# EAGLE board baseboard (EAGLE 9.6.2)
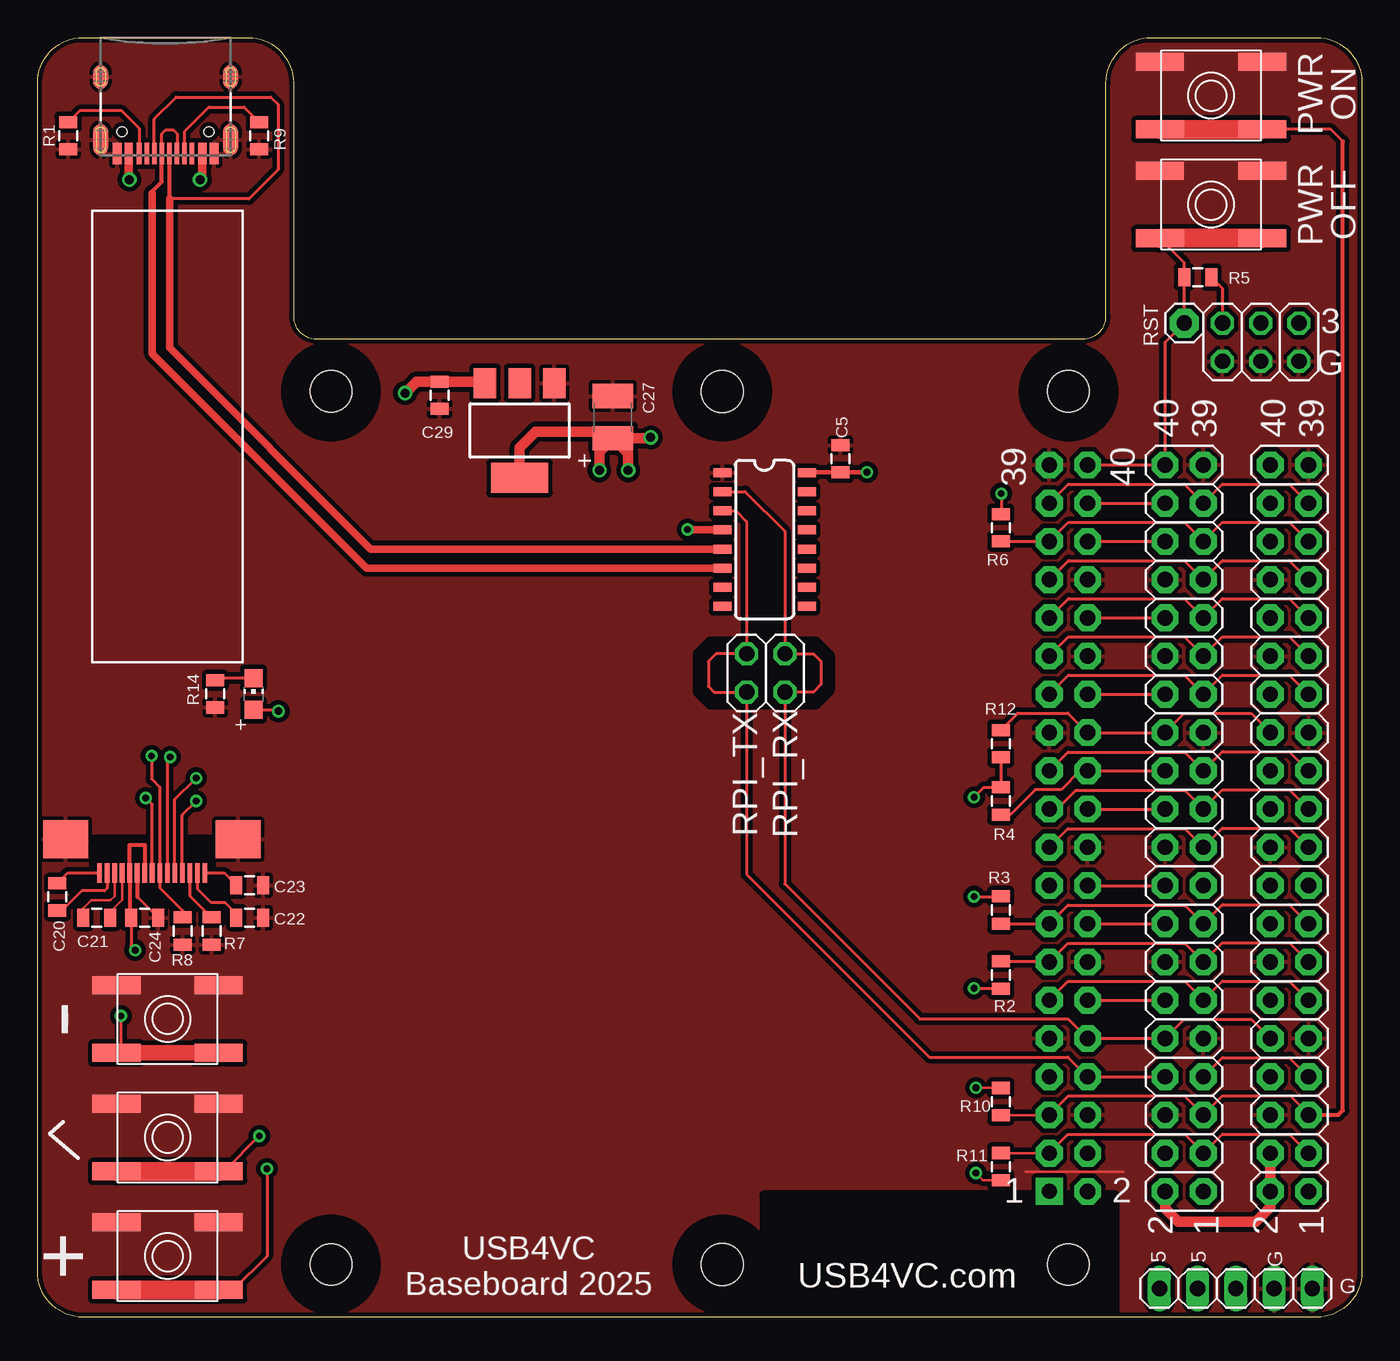
[diagram p0: board, top side]
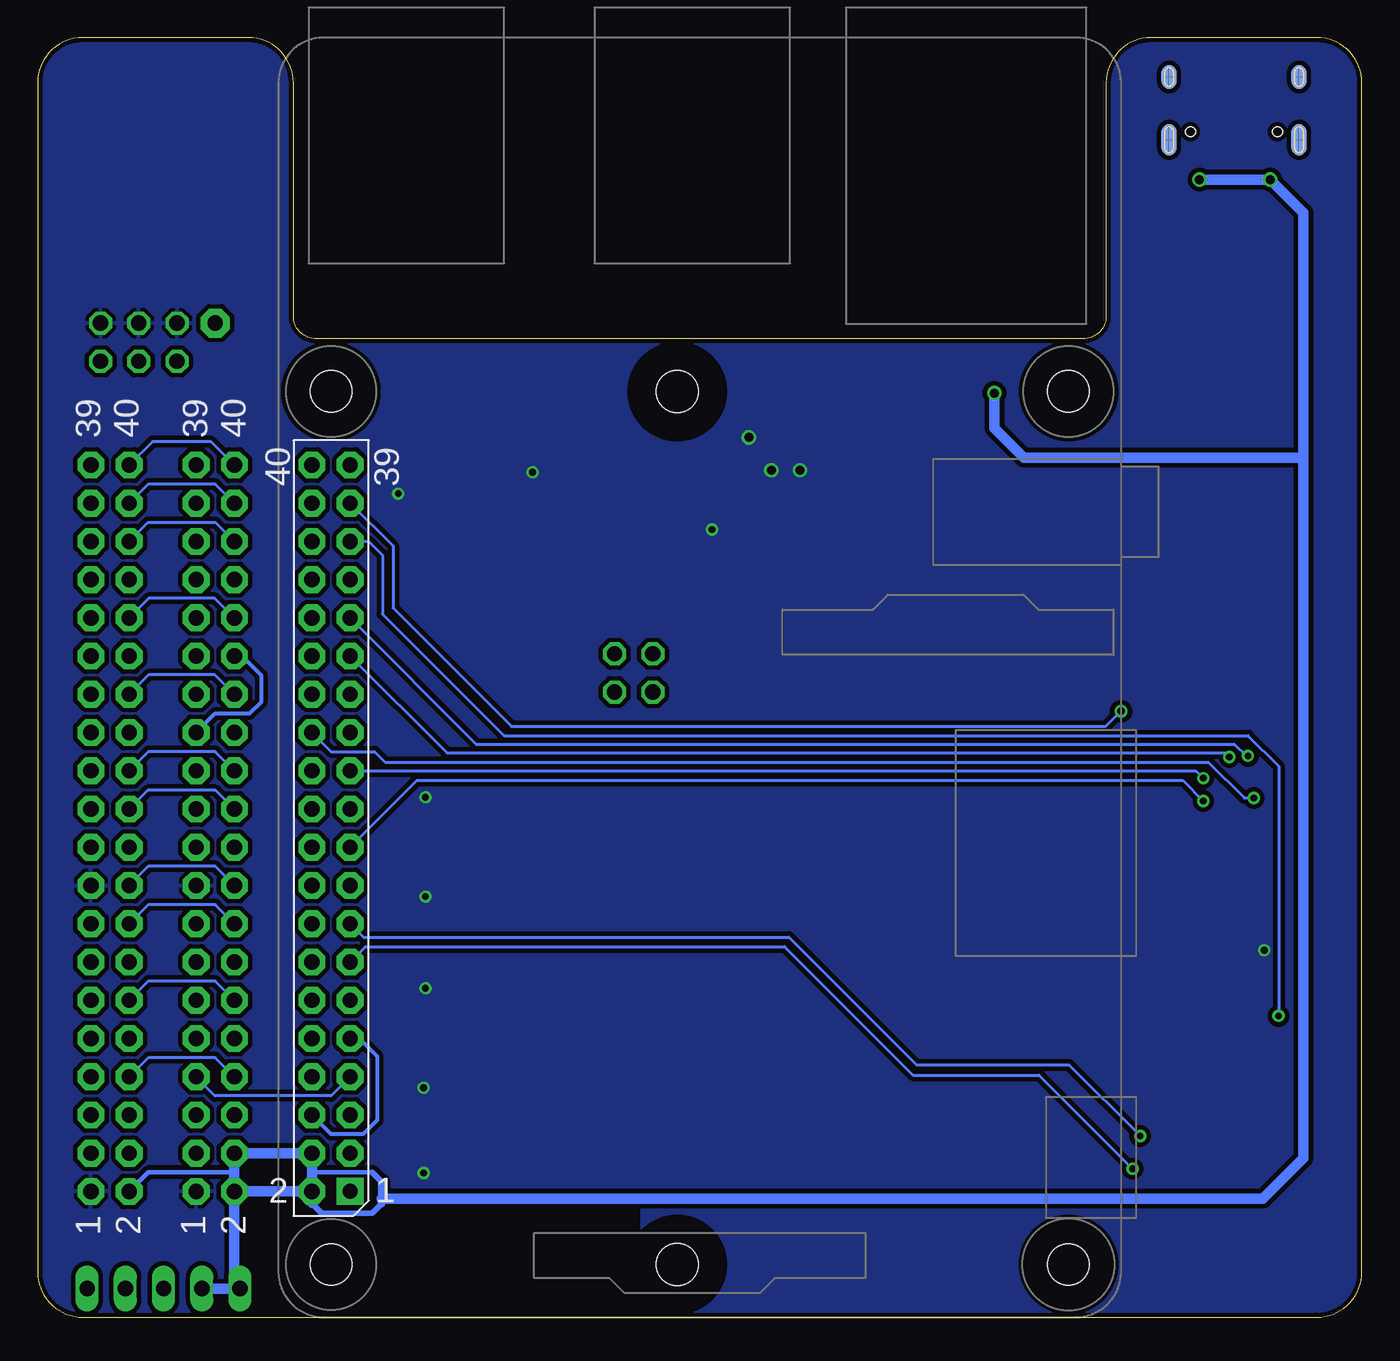
[diagram p1: board, bottom side, seen from below]

Size 88 x 85 mm. Coordinates in mm from the lower left corner, seen from the top.
Outline: 74,85 85,85 arc-90 88,82 88,3 arc-90 85,0 3,0 arc-90 0,3 0,82 arc-90 3,85 14,85 arc-90 17,82 17,66.5 arc90 18.5,65 69.5,65 arc90 71,66.5 71,82 arc-90 74,85
Copper layers (1*16): Top 0.035mm / dielectric 1.5mm / Bottom 0.035mm
Design rules "deku_2layer_6mil": minimum track width 6mil, minimum drill 15mil, track to track 6mil, track to pad 6mil, pad to pad 6mil, via to via 6mil, smd to smd 6mil, copper to edge 10mil, drill to drill 6mil, minimum pad ring 7mil, minimum via ring 7mil, stop-mask expansion 4mil, vias tented up to drill 25mil, thermal gap 10mil
Net classes: 1 power: width 0.178 mm
tRestrict: area 3.7,27.4 to 11.6,31.8; area 65.5,0.5 to 71.5,6.5; area 16.5,0.5 to 22.5,6.5; area 65.5,58.5 to 71.5,64.5; area 16.5,58.5 to 22.5,64.5; area 48.3,0 to 71.6,8.1; area 43.9,40.8 to 52.6,44.8
bRestrict: area 65.5,58.5 to 71.5,64.5; area 65.5,0.5 to 71.5,6.5; area 16.5,0.5 to 22.5,6.5; area 16.5,58.5 to 22.5,64.5; area 48.3,0 to 71.6,8.1

## Footprints (pad centres in the part's own frame; a part is rotated, then mirrored left to right if it is on the bottom)
0805 = smd 0.8 x 1.2: 1 -0.9,0; 2 0.9,0
C1210 = smd 1.6 x 2.7: 1 -1.4,0; 2 1.4,0
SOT223 = smd 1.5 x 2: 1 -2.3,-3.15; 2 0,-3.15; 3 2.3,-3.15 | smd 3.8 x 2: 4 0,3.15
USB-C-16P = smd 0.3 x 1.45: A5 -1.25,0; A6 -0.25,0; A7 0.25,0; A8 1.25,0; B5 1.75,0; B6 0.75,0; B7 -0.75,0; B8 -1.75,0 | smd 0.6 x 1.45: GND -3.225,0; GND2 3.225,0 | smd 1 x 2.1: SHLD1 -4.32,-0.915; SHLD2 4.32,-0.915 | smd 1 x 2.1 bottom: SHLD3 -4.32,-0.915; SHLD4 4.32,-0.915 | smd 1 x 1.6: SHLD5 -4.32,-5.095; SHLD8 4.32,-5.095 | smd 1 x 1.6 bottom: SHLD6 -4.32,-5.095; SHLD7 4.32,-5.095 | smd 0.55 x 1.45: VBUS1 -2.45,0; VBUS2 2.45,0 | hole 0.65: -2.89,-1.445; 2.89,-1.445
1X01 = drill 1.016 pad 1.93 octagon: 1 0,0
1X05 = drill 1.016 long: 1 -5.08,0; 2 -2.54,0; 3 0,0; 4 2.54,0; 5 5.08,0
2X03 = drill 1.016 octagon: 1 -2.54,-1.27; 2 -2.54,1.27; 3 0,-1.27; 4 0,1.27; 5 2.54,-1.27; 6 2.54,1.27
2X02 = drill 1.016 octagon: 1 -1.27,-1.27; 2 -1.27,1.27; 3 1.27,-1.27; 4 1.27,1.27
CHIP-LED0805 = smd 1.2 x 1.2: A 0,-1.05; C 0,1.05
RPI3-NO-CONNECTORS = drill 1.016 pad 1.778 square: P$1 -8.37,51.23 | drill 1.016 pad 1.778 octagon: P$2 -8.357,53.772; P$3 -10.897,51.232; P$4 -10.897,53.772; P$5 -13.437,51.232; P$6 -13.437,53.772; P$7 -15.977,51.232; P$8 -15.977,53.772; P$9 -18.517,51.232; P$10 -18.517,53.772; P$11 -21.057,51.232; P$12 -21.057,53.772; P$13 -23.597,51.232; P$14 -23.597,53.772; P$15 -26.137,51.232; P$16 -26.137,53.772; P$17 -28.677,51.232; P$18 -28.677,53.772; P$19 -31.217,51.232; P$20 -31.217,53.772; P$21 -33.757,51.232; P$22 -33.757,53.772; P$23 -36.297,51.232; P$24 -36.297,53.772; P$25 -38.837,51.232; P$26 -38.837,53.772; P$27 -41.377,51.232; P$28 -41.377,53.772; P$29 -43.917,51.232; P$30 -43.917,53.772; P$31 -46.457,51.232; P$32 -46.457,53.772; P$33 -48.997,51.232; P$34 -48.997,53.772; P$35 -51.537,51.232; P$36 -51.537,53.772; P$37 -54.077,51.232; P$38 -54.077,53.772; P$39 -56.617,51.232; P$40 -56.617,53.772 | hole 2.75: -3.5,3.5; -61.5,3.5; -3.5,52.5; -61.5,52.5
2X20-BIG = drill 1.016 pad 1.778 octagon: 1 -24.13,-1.27; 2 -24.13,1.27; 3 -21.59,-1.27; 4 -21.59,1.27; 5 -19.05,-1.27; 6 -19.05,1.27; 7 -16.51,-1.27; 8 -16.51,1.27; 9 -13.97,-1.27; 10 -13.97,1.27; 11 -11.43,-1.27; 12 -11.43,1.27; 13 -8.89,-1.27; 14 -8.89,1.27; 15 -6.35,-1.27; 16 -6.35,1.27; 17 -3.81,-1.27; 18 -3.81,1.27; 19 -1.27,-1.27; 20 -1.27,1.27; 21 1.27,-1.27; 22 1.27,1.27; 23 3.81,-1.27; 24 3.81,1.27; 25 6.35,-1.27; 26 6.35,1.27; 27 8.89,-1.27; 28 8.89,1.27; 29 11.43,-1.27; 30 11.43,1.27; 31 13.97,-1.27; 32 13.97,1.27; 33 16.51,-1.27; 34 16.51,1.27; 35 19.05,-1.27; 36 19.05,1.27; 37 21.59,-1.27; 38 21.59,1.27; 39 24.13,-1.27; 40 24.13,1.27
EVQ-Q2 = smd 3.2 x 1.2: A -3.4,-2.25; A' 3.4,-2.25; B -3.4,2.25; B' 3.4,2.25
LUL_UG-2864HSWEG01_1.3_WRAPAROUND = smd 0.31 x 1.28: 1 3.5,0; 2 3,0; 3 2.5,0; 4 2,0; 5 1.5,0; 6 1,0; 7 0.5,0; 8 0,0; 9 -0.5,0; 10 -1,0; 11 -1.5,0; 12 -2,0; 13 -2.5,0; 14 -3,0; 15 -3.5,0 | smd 3 x 2.5: 16 5.75,-2.24; 17 -5.7,-2.24
SO016 = smd 0.6 x 1.2: 1 -4.445,-2.8; 2 -3.175,-2.8; 3 -1.905,-2.8; 4 -0.635,-2.8; 5 0.635,-2.8; 6 1.905,-2.8; 7 3.175,-2.8; 8 4.445,-2.8; 9 4.445,2.8; 10 3.175,2.8; 11 1.905,2.8; 12 0.635,2.8; 13 -0.635,2.8; 14 -1.905,2.8; 15 -3.175,2.8; 16 -4.445,2.8
M2.5HOLE = hole 2.8: 0,0

## Placement (x,y rotation side)
C5  100nF  [0805]  53.34,57.02 270 top
C20  1uF  [0805]  1.31,27.92 90 top
C21  1uF  [0805]  3.94,26.54 180 top
C22  2.2uF  [0805]  14.1,26.54 180 top
C23  2.2uF  [0805]  14.1,28.7 180 top
C24  100nF  [0805]  7.11,26.54 180 top
C27  47uF  [C1210]  38.23,59.79 90 top
C29  2.2uF  [0805]  26.71,61.25 90 top
IC1  LD117AS33TR  [SOT223]  32.03,58.9 180 top
J2  [USB-C-16P]  8.5,77.3 180 top
JP3  [1X01]  76.2,66.04 0 top
JP5  [1X05]  79.63,1.91 0 top
JP6  [2X03]  81.28,64.77 0 top
JP7  [2X02]  48.39,42.8 180 top
LED1  [CHIP-LED0805]  14.35,41.4 0 top
P1  RPI3NO-CONNECTORS  [RPI3-NO-CONNECTORS]  16,0 270 top
P2  [2X20-BIG]  76.2,32.49 90 top
P3  [2X20-BIG]  83.19,32.49 90 top
R1  5.1K  [0805]  2.03,78.49 270 top
R2  5.1K  [0805]  64.01,22.73 270 top
R3  5.1K  [0805]  64.01,27.05 90 top
R4  5.1K  [0805]  64.01,34.29 270 top
R5  5.1K  [0805]  77.09,69.09 0 top
R6  5.1K  [0805]  64.01,52.45 90 top
R7  390K  [0805]  11.56,25.65 90 top
R8  5.1K  [0805]  9.65,25.65 270 top
R9  5.1K  [0805]  14.73,78.49 270 top
R10  5.1K  [0805]  64.01,14.33 270 top
R11  5.1K  [0805]  64.01,10.01 90 top
R12  5.1K  [0805]  64.01,38.1 90 top
R14  2K  [0805]  11.81,41.4 90 top
SW2  SPST_TACT-EVQQ2  [EVQ-Q2]  77.98,73.91 180 top
SW5  SPST_TACT-EVQQ2  [EVQ-Q2]  8.64,19.81 0 top
SW6  SPST_TACT-EVQQ2  [EVQ-Q2]  8.64,11.94 0 top
SW7  SPST_TACT-EVQQ2  [EVQ-Q2]  8.64,4.06 0 top
SW8  SPST_TACT-EVQQ2  [EVQ-Q2]  77.98,81.15 0 top
U2  [LUL_UG-2864HSWEG01_1.3_WRAPAROUND]  7.62,29.51 180 top
U5  CH340C  [SO016]  48.31,51.66 270 top
U$2  M2.5HOLE  [M2.5HOLE]  45.5,3.5 0 top
U$3  M2.5HOLE  [M2.5HOLE]  45.5,61.5 0 top

## Library data of the parts
C5 C20-C24 C27 C29 = clock
IC1 = v-reg
J2 = SparkFun-Connectors; PROD_ID: CONN-14122
JP3 P2 P3 = adafruit_changed
JP5-JP7 = pinhead
LED1 = adafruit
P1 = e14_Rpi3_RevA
R1 R4 R8-R12 = joyAnalog
R2 R3 R5-R7 R14 = SparkFun-Passives
SW2 SW5-SW8 = duckypad
U2 = lul
U5 = SparkFun-IC-Comms; PROD_ID: IC-14038
U$2 U$3 = f1c100s

## Nets
+3V3: C5.2 C24.2 C27.1 IC1.4 JP6.2 JP6.4 JP6.6 P2.1 P2.17 P3.1 P3.17 R2.2 R3.2 R4.1 R5.2 R6.2 R10.1 R11.1 R12.1 U2.5 U2.7 U5.4 U5.16
+5V: C29.2 IC1.3 J2.VBUS1 J2.VBUS2 JP5.1 JP5.2 P1.P$2 P1.P$4 P2.2 P2.4 P3.2 P3.4
ENTER_BUTTON: P1.P$15 P2.15 P3.15 R3.1 SW6.A SW6.A'
GND: C5.1 C22.1 C23.1 C24.1 C27.2 C29.1 IC1.1 J2.GND J2.GND2 J2.SHLD1 J2.SHLD2 J2.SHLD3 J2.SHLD4 J2.SHLD5 J2.SHLD6 J2.SHLD7 J2.SHLD8 JP5.4 JP5.5 JP6.1 JP6.3 JP6.5 P1.P$6 P1.P$9 P1.P$14 P1.P$20 P1.P$25 P1.P$30 P1.P$34 P1.P$39 P2.6 P2.9 P2.14 P2.20 P2.25 P2.30 P2.34 P2.39 P3.6 P3.9 P3.14 P3.20 P3.25 P3.30 P3.34 P3.39 R1.2 R7.1 R8.2 R9.2 R14.1 SW2.A SW2.A' SW5.B SW5.B' SW6.B SW6.B' SW7.B SW7.B' SW8.B SW8.B' U2.6 U2.16 U2.17 U5.1
MINUS_BUTTON: P1.P$35 P2.35 P3.35 R6.1 SW5.A SW5.A'
N$1: J2.A6 J2.B6 U5.5
N$2: J2.A5 R9.1
N$3: J2.A7 J2.B7 U5.6
N$4: LED1.A P1.P$37 P2.37 P3.37
N$5: P1.P$3 P2.3 P3.3 R11.2
N$6: P1.P$5 P2.5 P3.5 R10.2 SW8.A SW8.A'
N$7: J2.B5 R1.1
N$8: P1.P$7 P2.7 P3.7
N$9: P1.P$11 P2.11 P3.11
N$10: LED1.C R14.2
N$12: P1.P$19 P2.19 P3.19 U2.12
N$13: P1.P$21 P2.21 P3.21
N$14: P1.P$23 P2.23 P3.23 U2.11
N$15: P1.P$27 P2.27 P3.27
N$16: P1.P$29 P2.29 P3.29 U2.10
N$19: P1.P$33 P2.33 P3.33
N$22: P1.P$12 P2.12 P3.12
N$23: P1.P$16 P2.16 P3.16
N$24: P1.P$18 P2.18 P3.18
N$25: P1.P$22 P2.22 P3.22
N$26: P1.P$24 P2.24 P3.24 R4.2
N$27: P1.P$26 P2.26 P3.26 R12.2 U2.8
N$28: P1.P$28 P2.28 P3.28
N$29: P1.P$32 P2.32 P3.32
N$30: P1.P$36 P2.36 P3.36
N$31: P1.P$38 P2.38 P3.38
N$32: JP3.1 P1.P$40 P2.40 P3.40 R5.1 SW2.B SW2.B'
N$35: C20.2 U2.1
N$36: C20.1 U2.2
N$37: C21.2 U2.3
N$38: C21.1 U2.4
N$39: R7.2 U2.13
N$40: C22.2 U2.14
N$41: C23.2 U2.15
N$43: P1.P$31 P2.31 P3.31 R8.1 U2.9
PLUS_BUTTON: P1.P$13 P2.13 P3.13 R2.1 SW7.A SW7.A'
RPI_RX: JP7.1 JP7.2 P1.P$10 P2.10 P3.10 U5.2
RPI_TX: JP7.3 JP7.4 P1.P$8 P2.8 P3.8 U5.3

## Tracks (layer width: path | path; a pad name or v marks a point on that pad's centre or on a via)
+3V3  (via drill 0.45, 0.6)
  Top 0.152: C24.2 6.15,26.6 | v62.36,9.58 62.83,9.11 R11.1 | v62.36,15.24 63.99,15.24 R10.1
  Top 0.203: v62.23,21.84 64,21.84 R2.2 | v62.23,27.94 64,27.94 R3.2 | v64.03,54.71 64.03,53.38 R6.2 | R12.1 R4.1 62.88,35.19 v62.23,34.54 | C24.2 6.21,24.65 v6.48,24.38 | R5.2 78.74,68.34 JP6.2
  Top 0.254: 6.15,26.6 6.12,26.64 U2.5 6.12,31.37 7.12,31.37 U2.7
  Top 0.305: v55.12,56.13 55.11,56.12 C5.2 51.12,56.12 U5.16
  Top 0.508: v43.18,52.32 45.48,52.32 U5.4
  Top 0.711: IC1.4 32.03,57.76 33.09,58.82 37.8,58.82 C27.1 | C27.1 37.34,57.5 v37.34,56.26 | C27.1 39.24,57.38 v39.24,56.26 | C27.1 40.69,58.39 v40.74,58.45
  pour Bottom (isolate 0.305, rank 2): 0,0 0,85 88,85 88,0
+5V  (via drill 0.6)
  Top 0.508: 6.05,75.61 v6.1,75.56 | 10.95,75.72 v10.79,75.56
  Top 0.559: J2.VBUS2 6.05,75.61 | J2.VBUS1 10.95,75.72
  Top 0.61: 29.63,62.15 IC1.3
  Top 0.711: P2.2 74.93,7.19 75.79,6.33 80.95,6.33 81.92,7.29 P3.2 P3.4 | v24.42,61.39 25.18,62.15 C29.2 29.63,62.15
  Bottom 0.305: 65.76,9.63 69.77,9.63 | 74.93,9.68 74.98,9.63 80.64,9.63 P3.2
  Bottom 0.381: 65.13,7.54 65.76,6.91 69.14,6.91 69.77,7.54 | 65.76,9.63 65.13,8.99
  Bottom 0.508: 65.13,8.99 65.13,7.87 65.13,7.54
  Bottom 0.61: 69.77,7.54 P1.P$2 | P2.2 74.91,8.36
  Bottom 0.711: v10.79,75.56 v6.1,75.56 3.89,73.36 3.89,57.1 | 74.91,8.36 P1.P$2 69.77,9.63 P1.P$4 P2.4 74.93,9.68 P2.2 74.93,2.29 JP5.1 JP5.2 | 65.13,7.87 6.58,7.87 3.89,10.57 3.89,57.1 | v24.42,61.39 24.42,59.06 22.45,57.1 3.89,57.1
ENTER_BUTTON  (via drill 0.45)
  Top 0.203: P3.15 83.19,27.41 78.74,27.41 P2.15 76.22,27.38 68.48,27.38 P1.P$15 67.22,26.15 R3.1 | v14.73,12.04 12.38,9.69 SW6.A'
  Top 1.27: SW6.A SW6.A'
  Bottom 0.203: P1.P$15 66.34,25.25 38.08,25.25 29.59,16.76 19.46,16.76 v14.73,12.04
GND
  Top 0.152: 72.14,9.65 65.66,9.65
  Top 0.203: 6.62,27.93 C24.1
  Top 0.254: U2.6 6.62,27.93
  Bottom 0.254: P2.25 76.2,40.11 73.91,40.11 73.13,40.89 73.13,42.62 74.42,43.92 P2.30 | P1.P$9 66.62,18.52 65.46,17.35 65.46,13.08 66.37,12.17 68.5,12.17 P1.P$6
  pour Top (isolate 0.305): 0,85 0,0 88,0 88,85
  pour Top (no thermals): 3.3,7.37 13.97,7.37 13.97,5.33 3.3,5.33
  pour Top (no thermals): 3.3,15.24 13.97,15.24 13.97,13.21 3.3,13.21
  pour Top (no thermals): 3.3,23.11 13.97,23.11 13.97,21.08 3.3,21.08
  pour Top (no thermals): 72.64,84.45 83.31,84.45 83.31,82.42 72.64,82.42
  pour Top (no thermals): 72.64,77.22 83.31,77.22 83.31,75.18 72.64,75.18
MINUS_BUTTON  (via drill 0.45)
  Top 0.203: P3.35 83.19,52.81 78.74,52.81 P2.35 76.2,52.81 68.5,52.81 P1.P$35 67.22,51.55 R6.1 | v5.54,20.02 5.54,17.56 SW5.A
  Top 1.016: SW5.A' SW5.A
  Bottom 0.203: P1.P$35 65.99,51.54 65.08,50.62 65.08,46.71 57,38.63 7.57,38.63 5.54,36.6 v5.54,20.02
N$1
  Top 0.203: J2.B6 7.75,79.61 9.2,81.05 15.49,81.05 15.98,80.57 15.98,76.22 14.05,74.3 8.76,74.3
  Top 0.254: J2.A6 8.75,74.31 8.76,74.3
  Top 0.508: 8.76,74.3 8.76,64.39 22.12,51.03 U5.5
N$2
  Top 0.203: J2.A5 9.75,78.76 11.38,80.39 13.73,80.39 R9.1
N$3
  Top 0.203: J2.A7 8.25,78.61 8.51,78.87 9.02,78.87 9.27,78.61 9.27,77.32 J2.B7
  Top 0.254: J2.A7 8.26,75.44 7.62,74.8 7.62,74.68
  Top 0.508: 7.62,74.68 7.62,64.01 21.87,49.76 U5.6
N$4  (via drill 0.5)
  Top 0.203: P1.P$37 68.5,55.35 76.2,55.35 P2.37 78.74,55.35 83.19,55.35 P3.37 | LED1.A 15.91,40.35 v16,40.26
  Bottom 0.203: P1.P$37 64.39,51.23 64.39,47.12 56.52,39.24 17.02,39.24 v16,40.26
N$5
  Top 0.152: R11.2 P1.P$3
  Top 0.203: P1.P$3 68.48,12.14 76.22,12.14 P2.3 78.74,12.17 83.19,12.17 P3.3
N$6
  Top 0.152: R10.2 67.19,13.43 67.22,13.45
  Top 0.203: P3.5 84.45,13.49 83.24,14.71 78.74,14.71 P2.5 76.2,14.71 68.5,14.71 P1.P$5 67.22,13.45 | 86.74,78.11 85.94,78.9 SW8.A'
  Top 0.254: P3.5 86.44,13.44 86.74,13.74 86.74,78.11
  Top 1.27: SW8.A SW8.A'
N$7
  Top 0.203: J2.B5 6.75,78.97 5.59,80.14 2.78,80.14 R1.1
N$8
  Top 0.203: P2.7 78.74,17.25 83.19,17.25 P3.7
  Bottom 0.203: P1.P$7 68.5,14.71 76.22,14.71 77.47,15.95 P2.7
N$9
  Top 0.203: P1.P$11 68.48,22.3 76.22,22.3 P2.11 78.74,22.33 83.19,22.33 P3.11
N$10
  Top 0.203: LED1.C 11.96,42.45 R14.2
N$12  (via drill 0.45)
  Top 0.203: P1.P$19 68.48,32.46 76.22,32.46 P2.19 78.74,32.49 83.19,32.49 P3.19 | U2.12 9.62,33.37 v10.54,34.29
  Bottom 0.203: P1.P$19 62.79,35.66 11.91,35.66 v10.54,34.29
N$13
  Top 0.203: P1.P$21 67.74,33.76 68.98,35 76.22,35 P2.21 78.74,35.03 83.19,35.03 P3.21
N$14  (via drill 0.45)
  Top 0.203: P1.P$23 68.48,37.54 76.22,37.54 P2.23 78.74,37.57 83.19,37.57 P3.23 | U2.11 9.12,34.39 v10.54,35.81
  Bottom 0.203: P1.P$23 11.02,36.3 v10.54,35.81
N$15
  Top 0.203: P1.P$27 68.5,42.65 76.2,42.65 P2.27 78.74,42.65 83.19,42.65 P3.27
N$16  (via drill 0.45)
  Top 0.203: P1.P$29 68.5,45.19 76.2,45.19 P2.29 78.74,45.19 83.19,45.19 P3.29 | v8.81,37.21 8.62,37.02 U2.10
  Bottom 0.203: P1.P$29 60.81,37.49 9.09,37.49 v8.81,37.21
N$19
  Top 0.203: P1.P$33 68.5,50.27 76.2,50.27 P2.33 78.74,50.27 83.19,50.27 P3.33
N$22
  Top 0.203: P1.P$12 P2.12
  Bottom 0.203: P2.12 76.2,22.33 80.64,22.33 P3.12
N$23
  Top 0.203: P1.P$16 P2.16
  Bottom 0.203: P2.16 76.2,27.41 80.64,27.41 P3.16
N$24
  Top 0.203: P1.P$18 P2.18
  Bottom 0.203: P2.18 76.2,29.95 80.64,29.95 P3.18
N$25
  Top 0.203: P1.P$22 P2.22
  Bottom 0.203: P2.22 76.17,35 80.67,35 P3.22
N$26
  Top 0.203: P2.24 P1.P$24 69.27,36.3 68.02,35.05 66.29,35.05 64.63,33.39 R4.2
  Bottom 0.203: P2.24 76.2,37.57 80.64,37.57 P3.24
N$27  (via drill 0.45)
  Top 0.203: P3.26 80.64,40.11 76.2,40.11 P2.26 P1.P$26 68.48,40.13 65.14,40.13 R12.2 | v7.19,34.49 7.62,34.06 U2.8
  Bottom 0.203: v7.19,34.49 7.82,34.49 10.21,36.88 64.92,36.88 65.61,37.57 68.5,37.57 P1.P$26
N$28
  Top 0.203: P1.P$28 P2.28
  Bottom 0.203: P2.28 76.22,42.67 80.62,42.67 P3.28
N$29
  Top 0.203: P1.P$32 P2.32
  Bottom 0.203: P2.32 76.22,47.75 80.62,47.75 P3.32
N$30
  Top 0.203: P1.P$36 P2.36
  Bottom 0.203: P2.36 76.17,52.78 80.67,52.78 P3.36
N$31
  Top 0.203: P1.P$38 P2.38
  Bottom 0.203: P2.38 76.2,55.35 80.64,55.35 P3.38
N$32
  Top 0.203: P1.P$40 P2.40 74.93,64.77 JP3.1 76.2,69.08 R5.1 76.19,70.05 SW2.B'
  Top 1.27: SW2.B SW2.B'
  Bottom 0.203: P2.40 76.48,58.17 80.37,58.17 P3.40
N$35
  Top 0.203: C20.2 2,29.51 U2.1
N$36
  Top 0.203: U2.2 4.62,28.5 4.45,28.32 2.92,28.32 1.62,27.02 C20.1
N$37
  Top 0.152: U2.3 5.12,27.98 4.83,27.69 3.56,27.69 3.04,27.17 C21.2
N$38
  Top 0.152: U2.4 5.62,27.72 4.84,26.93 C21.1
N$39
  Top 0.203: U2.13 10.12,27.98 11.55,26.55 R7.2
N$40
  Top 0.203: U2.14 10.62,28.45 11.51,27.56 12.44,27.56 13.2,26.8 C22.2
N$41
  Top 0.203: U2.15 12.39,29.51 C23.2
N$43  (via drill 0.45)
  Top 0.203: P1.P$31 68.5,47.73 76.2,47.73 P2.31 78.74,47.73 83.19,47.73 P3.31 | v7.57,37.29 7.57,35.76 8.12,35.21 U2.9 8.12,28.53 9.65,27 R8.1
  Bottom 0.203: P1.P$31 58.85,38.08 8.48,38.08 7.7,37.29 v7.57,37.29
PLUS_BUTTON  (via drill 0.45)
  Top 0.203: P3.13 83.19,24.87 78.74,24.87 P2.13 76.22,24.84 68.48,24.84 P1.P$13 67.19,23.63 R2.1 | v15.24,9.86 15.24,4.06 12.99,1.81 SW7.A'
  Top 1.27: SW7.A SW7.A'
  Bottom 0.203: P1.P$13 66.22,24.61 38.35,24.61 29.82,16.08 21.46,16.08 v15.24,9.86
RPI_RX
  Top 0.203: U5.2 47.02,54.84 49.66,52.2 JP7.1 51.56,44.07 52.07,43.56 52.07,42.04 51.56,41.53 JP7.2 49.66,28.78 58.62,19.81 68.48,19.81 P1.P$10 P2.10 76.2,19.79 80.64,19.79 P3.10
RPI_TX
  Top 0.203: P2.8 P1.P$8 68.48,17.27 59.26,17.27 47.12,29.41 JP7.4 44.96,41.53 44.58,41.91 44.58,43.56 45.09,44.07 JP7.3 47.12,52.86 46.41,53.57 U5.3
  Bottom 0.203: P2.8 76.2,17.25 80.64,17.25 P3.8

## Text on the board
tNames: PWR / ON | PWR / OFF | RST | 3 | G | 39 | 40 | 40 | 39 | 40 | 39 | RPI_TX | RPI_RX | - | - | 1 | 2 | 2 | 1 | 2 | 1 | + | 5 | 5 | G | USB4VC / Baseboard 2025 | USB4VC.com | G
bNames: 39 | 40 | 40 | 39 | 40 | 39 | 2 | 1 | 2 | 1 | 2 | 1